# Altium PCB NRF24L01.PcbDoc
Units mil, origin at the board's own origin, x right, y up, seen from the top; angles counter-clockwise.
Board outline 6000 x 4000 mil, 2 copper layers (Top Layer, Bottom Layer); 84 components, 10 nets, 600 pads, 36 vias.
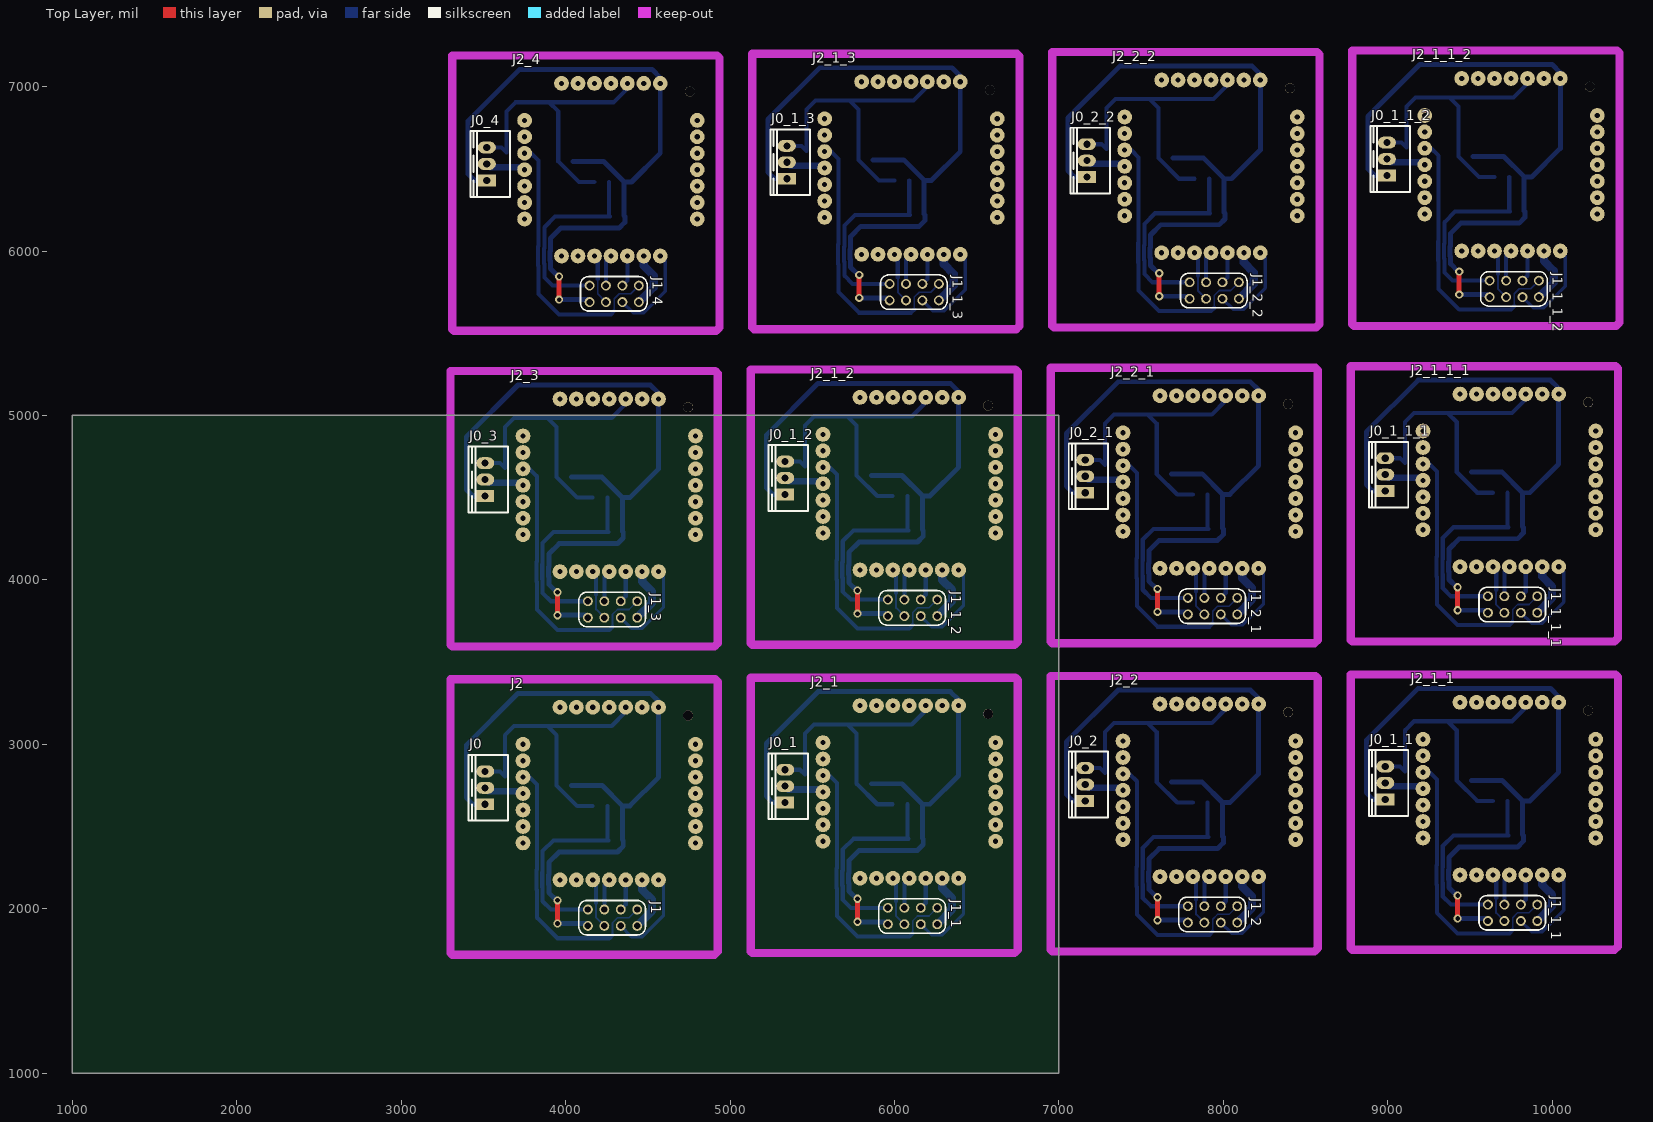
[diagram p0: Top Layer view]
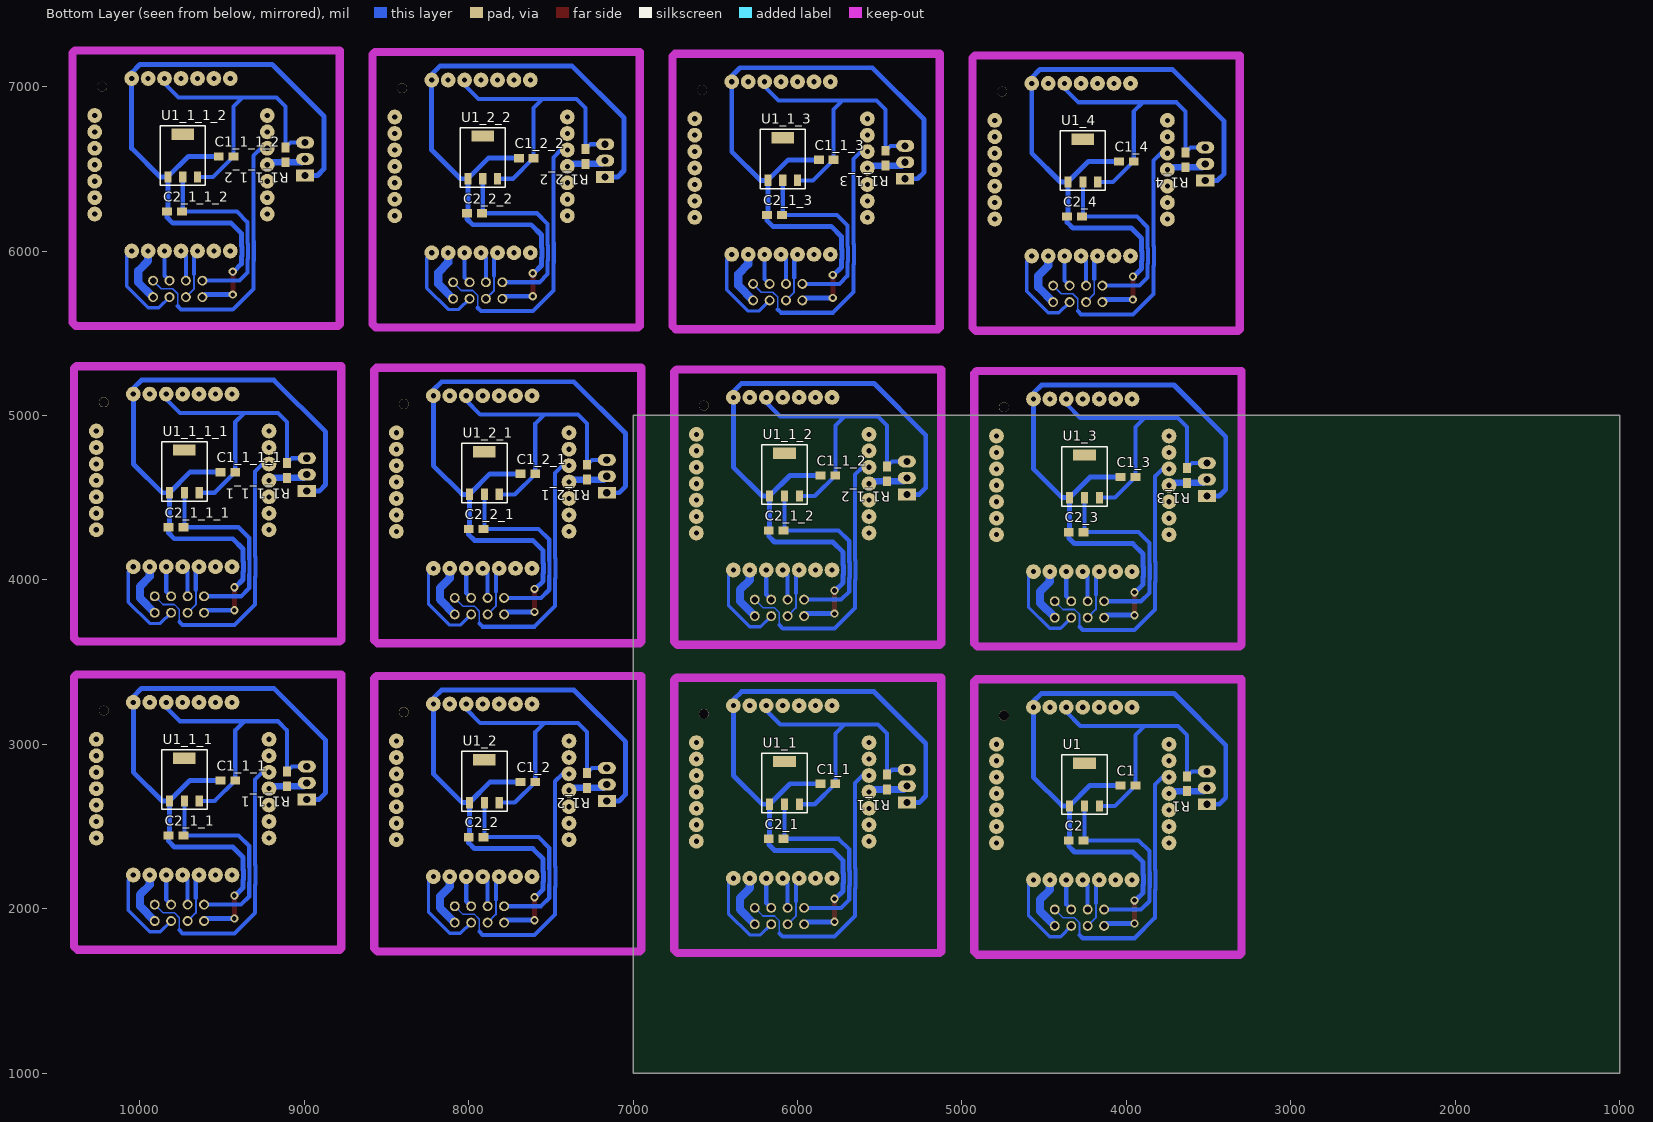
[diagram p1: Bottom Layer view, seen from below]

## Layer stack, top to bottom
Top Layer: signal copper 1.4
Dielectric: dielectric 12.6, FR-4, Dk 4.8
Bottom Layer: signal copper 1.4

## Board outline
1000,1000 7000,1000 7000,5000 1000,5000

## Design rules (kind name [scope] priority, off if disabled: settings)
Clearance [All] p1: gap=10
PolygonConnect [All] p1: connectstyle=Relief reliefconductorwidth=10 reliefentries=4 polygonreliefangle="90 Angle" airgapwidth=10
RoutingVias [All] p1: holewidth=28 width=50 viastyle="Through Hole" minholewidth=28 minwidth=50 maxholewidth=28 maxwidth=50
SolderMaskExpansion [All] p1: expansion=4
Width [All] p1: maxlimit=100 minlimit=10 preferedwidth=30
28 further rules are at their usual default settings.

## Classes and differential pairs
component class NRF24L01: C1 C2 J0 J1 J2 R1 U1

## Components (designator, comment, footprint, x,y, rotation, side; value= is the part's Value field where it differs from the comment)
C1 "10UF" 0805 3945,2750 r0 bottom
C1_1 "10UF" 0805 5770,2760 r0 bottom (schematic designator C1)
C1_1_1 "10UF" 0805 9420,2780 r0 bottom (schematic designator C1)
C1_1_1_1 "10UF" 0805 9420,4655 r0 bottom (schematic designator C1)
C1_1_1_2 "10UF" 0805 9430,6575 r0 bottom (schematic designator C1)
C1_1_2 "10UF" 0805 5770,4635 r0 bottom (schematic designator C1)
C1_1_3 "10UF" 0805 5780,6555 r0 bottom (schematic designator C1)
C1_2 "10UF" 0805 7595,2770 r0 bottom (schematic designator C1)
C1_2_1 "10UF" 0805 7595,4645 r0 bottom (schematic designator C1)
C1_2_2 "10UF" 0805 7605,6565 r0 bottom (schematic designator C1)
C1_3 "10UF" 0805 3945,4625 r0 bottom (schematic designator C1)
C1_4 "10UF" 0805 3955,6545 r0 bottom (schematic designator C1)
C2 "22UF" 0805 4260,2415 r0 bottom
C2_1 "22UF" 0805 6085,2425 r0 bottom (schematic designator C2)
C2_1_1 "22UF" 0805 9735,2445 r0 bottom (schematic designator C2)
C2_1_1_1 "22UF" 0805 9735,4320 r0 bottom (schematic designator C2)
C2_1_1_2 "22UF" 0805 9745,6240 r0 bottom (schematic designator C2)
C2_1_2 "22UF" 0805 6085,4300 r0 bottom (schematic designator C2)
C2_1_3 "22UF" 0805 6095,6220 r0 bottom (schematic designator C2)
C2_2 "22UF" 0805 7910,2435 r0 bottom (schematic designator C2)
C2_2_1 "22UF" 0805 7910,4310 r0 bottom (schematic designator C2)
C2_2_2 "22UF" 0805 7920,6230 r0 bottom (schematic designator C2)
C2_3 "22UF" 0805 4260,4290 r0 bottom (schematic designator C2)
C2_4 "22UF" 0805 4270,6210 r0 bottom (schematic designator C2)
J0 "CON3" CON3 3510,2635 r90 top
J0_1 "CON3" CON3 5335,2645 r90 top (schematic designator J0)
J0_1_1 "CON3" CON3 8985,2665 r90 top (schematic designator J0)
J0_1_1_1 "CON3" CON3 8985,4540 r90 top (schematic designator J0)
J0_1_1_2 "CON3" CON3 8995,6460 r90 top (schematic designator J0)
J0_1_2 "CON3" CON3 5335,4520 r90 top (schematic designator J0)
J0_1_3 "CON3" CON3 5345,6440 r90 top (schematic designator J0)
J0_2 "CON3" CON3 7160,2655 r90 top (schematic designator J0)
J0_2_1 "CON3" CON3 7160,4530 r90 top (schematic designator J0)
J0_2_2 "CON3" CON3 7170,6450 r90 top (schematic designator J0)
J0_3 "CON3" CON3 3510,4510 r90 top (schematic designator J0)
J0_4 "CON3" CON3 3520,6430 r90 top (schematic designator J0)
J1 "Component_1" NRF24L01 4235,1945 r270 top
J1_1 "Component_1" NRF24L01 6060,1955 r270 top (schematic designator J1)
J1_1_1 "Component_1" NRF24L01 9710,1975 r270 top (schematic designator J1)
J1_1_1_1 "Component_1" NRF24L01 9710,3850 r270 top (schematic designator J1)
J1_1_1_2 "Component_1" NRF24L01 9720,5770 r270 top (schematic designator J1)
J1_1_2 "Component_1" NRF24L01 6060,3830 r270 top (schematic designator J1)
J1_1_3 "Component_1" NRF24L01 6070,5750 r270 top (schematic designator J1)
J1_2 "Component_1" NRF24L01 7885,1965 r270 top (schematic designator J1)
J1_2_1 "Component_1" NRF24L01 7885,3840 r270 top (schematic designator J1)
J1_2_2 "Component_1" NRF24L01 7895,5760 r270 top (schematic designator J1)
J1_3 "Component_1" NRF24L01 4235,3820 r270 top (schematic designator J1)
J1_4 "Component_1" NRF24L01 4245,5740 r270 top (schematic designator J1)
J2 "MAGI-M8" MAGI-M8 4265,2700 r0 top
J2_1 "MAGI-M8" MAGI-M8 6090,2710 r0 top (schematic designator J2)
J2_1_1 "MAGI-M8" MAGI-M8 9740,2730 r0 top (schematic designator J2)
J2_1_1_1 "MAGI-M8" MAGI-M8 9740,4605 r0 top (schematic designator J2)
J2_1_1_2 "MAGI-M8" MAGI-M8 9750,6525 r0 top (schematic designator J2)
J2_1_2 "MAGI-M8" MAGI-M8 6090,4585 r0 top (schematic designator J2)
J2_1_3 "MAGI-M8" MAGI-M8 6100,6505 r0 top (schematic designator J2)
J2_2 "MAGI-M8" MAGI-M8 7915,2720 r0 top (schematic designator J2)
J2_2_1 "MAGI-M8" MAGI-M8 7915,4595 r0 top (schematic designator J2)
J2_2_2 "MAGI-M8" MAGI-M8 7925,6515 r0 top (schematic designator J2)
J2_3 "MAGI-M8" MAGI-M8 4265,4575 r0 top (schematic designator J2)
J2_4 "MAGI-M8" MAGI-M8 4275,6495 r0 top (schematic designator J2)
R1 "RES1" 0805 3630,2805 r270 bottom
R1_1 "RES1" 0805 5455,2815 r270 bottom (schematic designator R1)
R1_1_1 "RES1" 0805 9105,2835 r270 bottom (schematic designator R1)
R1_1_1_1 "RES1" 0805 9105,4710 r270 bottom (schematic designator R1)
R1_1_1_2 "RES1" 0805 9115,6630 r270 bottom (schematic designator R1)
R1_1_2 "RES1" 0805 5455,4690 r270 bottom (schematic designator R1)
R1_1_3 "RES1" 0805 5465,6610 r270 bottom (schematic designator R1)
R1_2 "RES1" 0805 7280,2825 r270 bottom (schematic designator R1)
R1_2_1 "RES1" 0805 7280,4700 r270 bottom (schematic designator R1)
R1_2_2 "RES1" 0805 7290,6620 r270 bottom (schematic designator R1)
R1_3 "RES1" 0805 3630,4680 r270 bottom (schematic designator R1)
R1_4 "RES1" 0805 3640,6600 r270 bottom (schematic designator R1)
U1 "LM1117" SOT-223 4345,2625 r180 bottom
U1_1 "LM1117" SOT-223 6170,2635 r180 bottom (schematic designator U1)
U1_1_1 "LM1117" SOT-223 9820,2655 r180 bottom (schematic designator U1)
U1_1_1_1 "LM1117" SOT-223 9820,4530 r180 bottom (schematic designator U1)
U1_1_1_2 "LM1117" SOT-223 9830,6450 r180 bottom (schematic designator U1)
U1_1_2 "LM1117" SOT-223 6170,4510 r180 bottom (schematic designator U1)
U1_1_3 "LM1117" SOT-223 6180,6430 r180 bottom (schematic designator U1)
U1_2 "LM1117" SOT-223 7995,2645 r180 bottom (schematic designator U1)
U1_2_1 "LM1117" SOT-223 7995,4520 r180 bottom (schematic designator U1)
U1_2_2 "LM1117" SOT-223 8005,6440 r180 bottom (schematic designator U1)
U1_3 "LM1117" SOT-223 4345,4500 r180 bottom (schematic designator U1)
U1_4 "LM1117" SOT-223 4355,6420 r180 bottom (schematic designator U1)

## Footprints (in the part's own frame and the unit in brackets; to place one, negate y for a bottom-side part, rotate by r counter-clockwise, add the part's x,y. Pads: shape width x height; smd on the part's side, far side on the other; paste and mask are expansions set on the pad)
0805 [mil]
  rect 60x50 smd: 1(0,0) 2(90,0)
CON3 [mil]
  rect 72x110 hole 43.31: 1(0,0)
  oval 72x110 hole 43.31: 2(100,0) 3(200,0)
  silkscreen extent -100,-140 300,100
MAGI-M8 [mil]
  round 90 hole 31.5: 1(300,525) 2(200,525) 3(100,525) 4(0,525) 5(-100,525) 6(-200,525) 7(-300,525) 8(-525,300) 9(-525,200) 10(-525,100) 11(-525,0) 12(-525,-100) 13(-525,-200) 14(-525,-300) 15(-300,-525) 16(-200,-525) 17(-100,-525) 18(0,-525) 19(100,-525) 20(200,-525) 21(300,-525) 22(525,-300) 23(525,-200) 24(525,-100) 25(525,0) 26(525,100) 27(525,200) 28(525,300)
NRF24L01 [mil]
  round 60 hole 39.37: 1(50,-100) 2(-50,-100) 3(50,0) 4(-50,0) 5(50,100) 6(-50,100) 7(50,200) 8(-50,200)
  silkscreen extent -105,-155 105,250
SOT-223 [mm]
  rect 1.1x1.75 smd: 1(0,0) 2(2.3,0) 3(4.6,0)
  rect 3.5x1.75 smd: 4(2.3,6.6)
  silkscreen extent -1.2,-1.3 5.8,7.9

## Part data
C1 C1_1 C1_1_1 C1_1_1_1 C1_1_1_2 C1_1_2 C1_1_3 C1_2 C1_2_1 C1_2_2 C1_3 C1_4 C2 C2_1 C2_1_1 C2_1_1_1 C2_1_1_2 C2_1_2 C2_1_3 C2_2 C2_2_1 C2_2_2 C2_3 C2_4: library part CAP_1, "Capacitor"
J0 J0_1 J0_1_1 J0_1_1_1 J0_1_1_2 J0_1_2 J0_1_3 J0_2 J0_2_1 J0_2_2 J0_3 J0_4: "Connector"

## Free pads (board coordinates)
  round 60 hole 60: 1(4745,3175) 1(4745,5050) 1(4755,6970) 1(6570,3185) 1(6570,5060) 1(6580,6980) 1(8395,3195) 1(8395,5070) 1(8405,6990) 1(10220,3205) 1(10220,5080) 1(10230,7000)

## Via types
v1: diameter 50, hole 28, Top Layer to Bottom Layer, 36 vias

## Nets (pads, with @x,y where several pads share a name; then routed paths per layer and width w, separated by ;. In a path a pad name is that pad's centre, name@x,y a point inside that pad or via, vN(x,y) a via of type N, cw(c..) or ccw(c..) an arc to the next point about the centre after c; other vN are vias at no path point)
GND: C1.2 C2.2 J0.1 J1.1 J2.1 U1.1 | length 4209.3
  Top Layer w30: v1(3950,1910) v1(3950,2050)
  Bottom Layer w30: J0.1 3435,2635 3395,2675 3395,2995 3710,3310 4515,3310 4565,3260 v1(4565,3225) 4565,2800 4390,2625 U1.1 ; v1(3950,1910) J1.1@4120,1910 ; v1@3950,2037.5 v1(3950,2050) 3945,2050 3897.5,2097.5 3897.5,2143.51 3895,2146.01 3895,2203.99 3897.5,2206.49 3897.5,2282.5 3960,2345 4315,2345 4350,2380 C2.2 4345,2420 U1.1 ; C1.2 4220.91,2750 4345,2625.91 U1.1
NetJ0_2: J0.2 J2.11 R1.2 | length 244.5
  Bottom Layer w30: J0.2 J0.2@3530,2715 ; J2.11@3725,2715 J2.11
  Bottom Layer w40: J0.2@3530,2715 R1.2 J2.11@3725,2715
PB1: J1.3 J2.17 | length 309
  Bottom Layer w12: 4185,2035 4185,1945 J1.3
  Bottom Layer w25: J2.17 4185,2155 4185,2035
PB2: J1.4 J2.18 | length 192.4
  Bottom Layer w25: J1.4 4235,2145 J2.18
PB3: J1.6 J2.19 | length 192.4
  Bottom Layer w25: J1.6 4365,2025 J2.19
PB4: J1.7 J2.20 | length 342.1
  Bottom Layer w50: J1.7 4525,1985 4525,2055 4465,2115 J2.20
PB5: J1.5 J2.21 | length 568.2
  Bottom Layer w20: J1.5 4400,1830 4465,1830 4595,1960 4595,2145 J2.21
PD2: J1.8 J2.10 | length 1703.9
  Bottom Layer w10: 4285,1830 4285,1840 4285,1915 4315,1945 4385,1945 J1.8
  Bottom Layer w25: J2.10 3780,2800 3825,2755 3825,2236.53 3822.5,2234.03 3822.5,2115.97 3825,2113.47 3825,1945 3950,1820 4265,1820 4285,1840
VCC: C1.1 J0.3 J2.3 R1.1 U1.3 | length 1828.9
  Bottom Layer w25: J0.3 3600,2835 R1.1 3630,3055 3685,3110 3890,3110 ; U1.3 4070,2625 C1.1 3945,3055 3890,3110 ; J2.3@4365,3195 4280,3110 3890,3110
VCC3.3: C2.1 J1.2 U1.2 | length 1242
  Bottom Layer w25: J1.2 3910,1995 3860,2045 3860,2127.97 3857.5,2130.47 3857.5,2219.53 3860,2222.03 3860,2350 3925,2415 C2.1 4254.45,2420.55 U1.2
pads on no net: C1_1.1 C1_1.2 C1_1_1.1 C1_1_1.2 C1_1_1_1.1 C1_1_1_1.2 C1_1_1_2.1 C1_1_1_2.2 C1_1_2.1 C1_1_2.2 C1_1_3.1 C1_1_3.2 C1_2.1 C1_2.2 C1_2_1.1 C1_2_1.2 C1_2_2.1 C1_2_2.2 C1_3.1 C1_3.2 C1_4.1 C1_4.2 C2_1.1 C2_1.2 C2_1_1.1 C2_1_1.2 C2_1_1_1.1 C2_1_1_1.2 C2_1_1_2.1 C2_1_1_2.2 C2_1_2.1 C2_1_2.2 C2_1_3.1 C2_1_3.2 C2_2.1 C2_2.2 C2_2_1.1 C2_2_1.2 C2_2_2.1 C2_2_2.2 C2_3.1 C2_3.2 C2_4.1 C2_4.2 J0_1.1 J0_1.2 J0_1.3 J0_1_1.1 J0_1_1.2 J0_1_1.3 J0_1_1_1.1 J0_1_1_1.2 J0_1_1_1.3 J0_1_1_2.1 J0_1_1_2.2 J0_1_1_2.3 J0_1_2.1 J0_1_2.2 J0_1_2.3 J0_1_3.1 J0_1_3.2 J0_1_3.3 J0_2.1 J0_2.2 J0_2.3 J0_2_1.1 J0_2_1.2 J0_2_1.3 J0_2_2.1 J0_2_2.2 J0_2_2.3 J0_3.1 J0_3.2 J0_3.3 J0_4.1 J0_4.2 J0_4.3 J1_1.1 J1_1.2 J1_1.3 J1_1.4 J1_1.5 J1_1.6 J1_1.7 J1_1.8 J1_1_1.1 J1_1_1.2 J1_1_1.3 J1_1_1.4 J1_1_1.5 J1_1_1.6 J1_1_1.7 J1_1_1.8 J1_1_1_1.1 J1_1_1_1.2 J1_1_1_1.3 J1_1_1_1.4 J1_1_1_1.5 J1_1_1_1.6 J1_1_1_1.7 J1_1_1_1.8 J1_1_1_2.1 J1_1_1_2.2 J1_1_1_2.3 J1_1_1_2.4 J1_1_1_2.5 J1_1_1_2.6 J1_1_1_2.7 J1_1_1_2.8 J1_1_2.1 J1_1_2.2 J1_1_2.3 J1_1_2.4 J1_1_2.5 J1_1_2.6 J1_1_2.7 J1_1_2.8 J1_1_3.1 J1_1_3.2 J1_1_3.3 J1_1_3.4 J1_1_3.5 J1_1_3.6 J1_1_3.7 J1_1_3.8 J1_2.1 J1_2.2 J1_2.3 J1_2.4 J1_2.5 J1_2.6 J1_2.7 J1_2.8 J1_2_1.1 J1_2_1.2 J1_2_1.3 J1_2_1.4 J1_2_1.5 J1_2_1.6 J1_2_1.7 J1_2_1.8 J1_2_2.1 J1_2_2.2 J1_2_2.3 J1_2_2.4 J1_2_2.5 J1_2_2.6 J1_2_2.7 J1_2_2.8 J1_3.1 J1_3.2 J1_3.3 J1_3.4 J1_3.5 J1_3.6 J1_3.7 J1_3.8 J1_4.1 J1_4.2 J1_4.3 J1_4.4 J1_4.5 J1_4.6 J1_4.7 J1_4.8 J2.2 J2.4 J2.5 J2.6 J2.7 J2.8 J2.9 J2.12 J2.13 J2.14 J2.15 J2.16 J2.22 J2.23 J2.24 J2.25 J2.26 J2.27 J2.28 J2_1.1 J2_1.2 J2_1.3 J2_1.4 J2_1.5 J2_1.6 J2_1.7 J2_1.8 J2_1.9 J2_1.10 J2_1.11 J2_1.12 J2_1.13 J2_1.14 J2_1.15 J2_1.16 J2_1.17 J2_1.18 J2_1.19 J2_1.20 J2_1.21 J2_1.22 J2_1.23 J2_1.24 J2_1.25 J2_1.26 J2_1.27 J2_1.28 J2_1_1.1 J2_1_1.2 J2_1_1.3 J2_1_1.4 J2_1_1.5 J2_1_1.6 J2_1_1.7 J2_1_1.8 J2_1_1.9 J2_1_1.10 J2_1_1.11 J2_1_1.12 J2_1_1.13 J2_1_1.14 J2_1_1.15 J2_1_1.16 J2_1_1.17 J2_1_1.18 J2_1_1.19 J2_1_1.20 J2_1_1.21 J2_1_1.22 J2_1_1.23 J2_1_1.24 J2_1_1.25 J2_1_1.26 J2_1_1.27 J2_1_1.28 J2_1_1_1.1 J2_1_1_1.2 J2_1_1_1.3 J2_1_1_1.4 J2_1_1_1.5 J2_1_1_1.6 J2_1_1_1.7 J2_1_1_1.8 J2_1_1_1.9 J2_1_1_1.10 J2_1_1_1.11 J2_1_1_1.12 J2_1_1_1.13 J2_1_1_1.14 J2_1_1_1.15 J2_1_1_1.16 J2_1_1_1.17 J2_1_1_1.18 J2_1_1_1.19 J2_1_1_1.20 J2_1_1_1.21 J2_1_1_1.22 J2_1_1_1.23 J2_1_1_1.24 J2_1_1_1.25 J2_1_1_1.26 J2_1_1_1.27 J2_1_1_1.28 J2_1_1_2.1 J2_1_1_2.2 J2_1_1_2.3 J2_1_1_2.4 J2_1_1_2.5 J2_1_1_2.6 J2_1_1_2.7 J2_1_1_2.8 J2_1_1_2.9 J2_1_1_2.10 J2_1_1_2.11 J2_1_1_2.12 J2_1_1_2.13 J2_1_1_2.14 J2_1_1_2.15 J2_1_1_2.16 J2_1_1_2.17 J2_1_1_2.18 J2_1_1_2.19 J2_1_1_2.20 J2_1_1_2.21 J2_1_1_2.22 J2_1_1_2.23 J2_1_1_2.24 J2_1_1_2.25 J2_1_1_2.26 J2_1_1_2.27 J2_1_1_2.28 J2_1_2.1 J2_1_2.2 J2_1_2.3 J2_1_2.4 J2_1_2.5 J2_1_2.6 J2_1_2.7 J2_1_2.8 J2_1_2.9 J2_1_2.10 J2_1_2.11 J2_1_2.12 J2_1_2.13 J2_1_2.14 J2_1_2.15 J2_1_2.16 J2_1_2.17 J2_1_2.18 J2_1_2.19 J2_1_2.20 J2_1_2.21 J2_1_2.22 J2_1_2.23 J2_1_2.24 J2_1_2.25 J2_1_2.26 J2_1_2.27 J2_1_2.28 J2_1_3.1 J2_1_3.2 J2_1_3.3 J2_1_3.4 J2_1_3.5 J2_1_3.6 J2_1_3.7 J2_1_3.8 J2_1_3.9 J2_1_3.10 J2_1_3.11 J2_1_3.12 J2_1_3.13 J2_1_3.14 J2_1_3.15 J2_1_3.16 J2_1_3.17 J2_1_3.18 J2_1_3.19 J2_1_3.20 J2_1_3.21 J2_1_3.22 J2_1_3.23 J2_1_3.24 J2_1_3.25 J2_1_3.26 J2_1_3.27 J2_1_3.28 J2_2.1 J2_2.2 J2_2.3 J2_2.4 J2_2.5 J2_2.6 J2_2.7 J2_2.8 J2_2.9 J2_2.10 J2_2.11 J2_2.12 J2_2.13 J2_2.14 J2_2.15 J2_2.16 J2_2.17 J2_2.18 J2_2.19 J2_2.20 J2_2.21 J2_2.22 J2_2.23 J2_2.24 J2_2.25 J2_2.26 J2_2.27 J2_2.28 J2_2_1.1 J2_2_1.2 J2_2_1.3 J2_2_1.4 J2_2_1.5 J2_2_1.6 J2_2_1.7 J2_2_1.8 J2_2_1.9 J2_2_1.10 J2_2_1.11 J2_2_1.12 J2_2_1.13 J2_2_1.14 J2_2_1.15 J2_2_1.16 J2_2_1.17 J2_2_1.18 J2_2_1.19 J2_2_1.20 J2_2_1.21 J2_2_1.22 J2_2_1.23 J2_2_1.24 J2_2_1.25 J2_2_1.26 J2_2_1.27 J2_2_1.28 J2_2_2.1 J2_2_2.2 J2_2_2.3 J2_2_2.4 J2_2_2.5 J2_2_2.6 J2_2_2.7 J2_2_2.8 J2_2_2.9 J2_2_2.10 J2_2_2.11 J2_2_2.12 J2_2_2.13 J2_2_2.14 J2_2_2.15 J2_2_2.16 J2_2_2.17 J2_2_2.18 J2_2_2.19 J2_2_2.20 J2_2_2.21 J2_2_2.22 J2_2_2.23 J2_2_2.24 J2_2_2.25 J2_2_2.26 J2_2_2.27 J2_2_2.28 J2_3.1 J2_3.2 J2_3.3 J2_3.4 J2_3.5 J2_3.6 J2_3.7 J2_3.8 J2_3.9 J2_3.10 J2_3.11 J2_3.12 J2_3.13 J2_3.14 J2_3.15 J2_3.16 J2_3.17 J2_3.18 J2_3.19 J2_3.20 J2_3.21 J2_3.22 J2_3.23 J2_3.24 J2_3.25 J2_3.26 J2_3.27 J2_3.28 J2_4.1 J2_4.2 J2_4.3 J2_4.4 J2_4.5 J2_4.6 J2_4.7 J2_4.8 J2_4.9 J2_4.10 J2_4.11 J2_4.12 J2_4.13 J2_4.14 J2_4.15 J2_4.16 J2_4.17 J2_4.18 J2_4.19 J2_4.20 J2_4.21 J2_4.22 J2_4.23 J2_4.24 J2_4.25 J2_4.26 J2_4.27 J2_4.28 R1_1.1 R1_1.2 R1_1_1.1 R1_1_1.2 R1_1_1_1.1 R1_1_1_1.2 R1_1_1_2.1 R1_1_1_2.2 R1_1_2.1 R1_1_2.2 R1_1_3.1 R1_1_3.2 R1_2.1 R1_2.2 R1_2_1.1 R1_2_1.2 R1_2_2.1 R1_2_2.2 R1_3.1 R1_3.2 R1_4.1 R1_4.2 U1.4 U1_1.1 U1_1.2 U1_1.3 U1_1.4 U1_1_1.1 U1_1_1.2 U1_1_1.3 U1_1_1.4 U1_1_1_1.1 U1_1_1_1.2 U1_1_1_1.3 U1_1_1_1.4 U1_1_1_2.1 U1_1_1_2.2 U1_1_1_2.3 U1_1_1_2.4 U1_1_2.1 U1_1_2.2 U1_1_2.3 U1_1_2.4 U1_1_3.1 U1_1_3.2 U1_1_3.3 U1_1_3.4 U1_2.1 U1_2.2 U1_2.3 U1_2.4 U1_2_1.1 U1_2_1.2 U1_2_1.3 U1_2_1.4 U1_2_2.1 U1_2_2.2 U1_2_2.3 U1_2_2.4 U1_3.1 U1_3.2 U1_3.3 U1_3.4 U1_4.1 U1_4.2 U1_4.3 U1_4.4
copper on no net: | length 119159.9
  Top Layer w30: v1(3950,3785) v1(3950,3925) ; v1(3960,5705) v1(3960,5845) ; v1(5775,1920) v1(5775,2060) ; v1(5775,3795) v1(5775,3935) ; v1(5785,5715) v1(5785,5855) ; v1(7600,1930) v1(7600,2070) ; v1(7600,3805) v1(7600,3945) ; v1(7610,5725) v1(7610,5865) ; v1(9425,1940) v1(9425,2080) ; v1(9425,3815) v1(9425,3955) ; v1(9435,5735) v1(9435,5875)
  Bottom Layer w10: 4285,3705 4285,3715 4285,3790 4315,3820 4385,3820 4435,3870 ; 4295,5625 4295,5635 4295,5710 4325,5740 4395,5740 4445,5790 ; 6110,1840 6110,1850 6110,1925 6140,1955 6210,1955 6260,2005 ; 6110,3715 6110,3725 6110,3800 6140,3830 6210,3830 6260,3880 ; 6120,5635 6120,5645 6120,5720 6150,5750 6220,5750 6270,5800 ; 7935,1850 7935,1860 7935,1935 7965,1965 8035,1965 8085,2015 ; 7935,3725 7935,3735 7935,3810 7965,3840 8035,3840 8085,3890 ; 7945,5645 7945,5655 7945,5730 7975,5760 8045,5760 8095,5810 ; 9760,1860 9760,1870 9760,1945 9790,1975 9860,1975 9910,2025 ; 9760,3735 9760,3745 9760,3820 9790,3850 9860,3850 9910,3900 ; 9770,5655 9770,5665 9770,5740 9800,5770 9870,5770 9920,5820
  Bottom Layer w12: 4185,3910 4185,3820 4235,3770 ; 4195,5830 4195,5740 4245,5690 ; 6010,2045 6010,1955 6060,1905 ; 6010,3920 6010,3830 6060,3780 ; 6020,5840 6020,5750 6070,5700 ; 7835,2055 7835,1965 7885,1915 ; 7835,3930 7835,3840 7885,3790 ; 7845,5850 7845,5760 7895,5710 ; 9660,2065 9660,1975 9710,1925 ; 9660,3940 9660,3850 9710,3800 ; 9670,5860 9670,5770 9720,5720
  Bottom Layer w20: 4335,3770 4400,3705 4465,3705 4595,3835 4595,4020 4565,4050 ; 4345,5690 4410,5625 4475,5625 4605,5755 4605,5940 4575,5970 ; 6160,1905 6225,1840 6290,1840 6420,1970 6420,2155 6390,2185 ; 6160,3780 6225,3715 6290,3715 6420,3845 6420,4030 6390,4060 ; 6170,5700 6235,5635 6300,5635 6430,5765 6430,5950 6400,5980 ; 7985,1915 8050,1850 8115,1850 8245,1980 8245,2165 8215,2195 ; 7985,3790 8050,3725 8115,3725 8245,3855 8245,4040 8215,4070 ; 7995,5710 8060,5645 8125,5645 8255,5775 8255,5960 8225,5990 ; 9810,1925 9875,1860 9940,1860 10070,1990 10070,2175 10040,2205 ; 9810,3800 9875,3735 9940,3735 10070,3865 10070,4050 10040,4080 ; 9820,5720 9885,5655 9950,5655 10080,5785 10080,5970 10050,6000
  Bottom Layer w25: 3510,4710 3600,4710 3630,4680 3630,4930 3685,4985 3890,4985 ; 3520,6630 3610,6630 3640,6600 3640,6850 3695,6905 3900,6905 ; 3740,4675 3780,4675 3825,4630 3825,4111.53 3822.5,4109.03 3822.5,3990.97 3825,3988.47 3825,3820 3950,3695 4265,3695 4285,3715 ; 3750,6595 3790,6595 3835,6550 3835,6031.53 3832.5,6029.03 3832.5,5910.97 3835,5908.47 3835,5740 3960,5615 4275,5615 4295,5635 ; 4135,3870 3910,3870 3860,3920 3860,4002.97 3857.5,4005.47 3857.5,4094.53 3860,4097.03 3860,4225 3925,4290 4260,4290 4254.45,4295.55 4254.45,4500 ; 4145,5790 3920,5790 3870,5840 3870,5922.97 3867.5,5925.47 3867.5,6014.53 3870,6017.03 3870,6145 3935,6210 4270,6210 4264.45,6215.55 4264.45,6420 ; 4163.9,4500 4070,4500 3945,4625 3945,4930 3890,4985 ; 4165,4050 4185,4030 4185,3910 ; 4173.9,6420 4080,6420 3955,6545 3955,6850 3900,6905 ; 4175,5970 4195,5950 4195,5830 ; 4235,3870 4235,4020 4265,4050 ; 4245,5790 4245,5940 4275,5970 ; 4335,3870 4365,3900 4365,4050 ; 4345,5790 4375,5820 4375,5970 ; 4365,5070 4280,4985 3890,4985 ; 4375,6990 4290,6905 3900,6905 ; 5335,2845 5425,2845 5455,2815 5455,3065 5510,3120 5715,3120 ; 5335,4720 5425,4720 5455,4690 5455,4940 5510,4995 5715,4995 ; 5345,6640 5435,6640 5465,6610 5465,6860 5520,6915 5725,6915 ; 5565,2810 5605,2810 5650,2765 5650,2246.53 5647.5,2244.03 5647.5,2125.97 5650,2123.47 5650,1955 5775,1830 6090,1830 6110,1850 ; 5565,4685 5605,4685 5650,4640 5650,4121.53 5647.5,4119.03 5647.5,4000.97 5650,3998.47 5650,3830 5775,3705 6090,3705 6110,3725 ; 5575,6605 5615,6605 5660,6560 5660,6041.53 5657.5,6039.03 5657.5,5920.97 5660,5918.47 5660,5750 5785,5625 6100,5625 6120,5645 ; 5960,2005 5735,2005 5685,2055 5685,2137.97 5682.5,2140.47 5682.5,2229.53 5685,2232.03 5685,2360 5750,2425 6085,2425 6079.45,2430.55 6079.45,2635 ; 5960,3880 5735,3880 5685,3930 5685,4012.97 5682.5,4015.47 5682.5,4104.53 5685,4107.03 5685,4235 5750,4300 6085,4300 6079.45,4305.55 6079.45,4510 ; 5970,5800 5745,5800 5695,5850 5695,5932.97 5692.5,5935.47 5692.5,6024.53 5695,6027.03 5695,6155 5760,6220 6095,6220 6089.45,6225.55 6089.45,6430 ; 5988.9,2635 5895,2635 5770,2760 5770,3065 5715,3120 ; 5988.9,4510 5895,4510 5770,4635 5770,4940 5715,4995 ; 5990,2185 6010,2165 6010,2045 ; 5990,4060 6010,4040 6010,3920 ; 5998.9,6430 5905,6430 5780,6555 5780,6860 5725,6915 ; 6000,5980 6020,5960 6020,5840 ; 6060,2005 6060,2155 6090,2185 ; 6060,3880 6060,4030 6090,4060 ; 6070,5800 6070,5950 6100,5980 ; 6160,2005 6190,2035 6190,2185 ; 6160,3880 6190,3910 6190,4060 ; 6170,5800 6200,5830 6200,5980 ; 6190,3205 6105,3120 5715,3120 ; 6190,5080 6105,4995 5715,4995 ; 6200,7000 6115,6915 5725,6915 ; 7160,2855 7250,2855 7280,2825 7280,3075 7335,3130 7540,3130 ; 7160,4730 7250,4730 7280,4700 7280,4950 7335,5005 7540,5005 ; 7170,6650 7260,6650 7290,6620 7290,6870 7345,6925 7550,6925 ; 7390,2820 7430,2820 7475,2775 7475,2256.53 7472.5,2254.03 7472.5,2135.97 7475,2133.47 7475,1965 7600,1840 7915,1840 7935,1860 ; 7390,4695 7430,4695 7475,4650 7475,4131.53 7472.5,4129.03 7472.5,4010.97 7475,4008.47 7475,3840 7600,3715 7915,3715 7935,3735 ; 7400,6615 7440,6615 7485,6570 7485,6051.53 7482.5,6049.03 7482.5,5930.97 7485,5928.47 7485,5760 7610,5635 7925,5635 7945,5655 ; 7785,2015 7560,2015 7510,2065 7510,2147.97 7507.5,2150.47 7507.5,2239.53 7510,2242.03 7510,2370 7575,2435 7910,2435 7904.45,2440.55 7904.45,2645 ; 7785,3890 7560,3890 7510,3940 7510,4022.97 7507.5,4025.47 7507.5,4114.53 7510,4117.03 7510,4245 7575,4310 7910,4310 7904.45,4315.55 7904.45,4520 ; 7795,5810 7570,5810 7520,5860 7520,5942.97 7517.5,5945.47 7517.5,6034.53 7520,6037.03 7520,6165 7585,6230 7920,6230 7914.45,6235.55 7914.45,6440 ; 7813.9,2645 7720,2645 7595,2770 7595,3075 7540,3130 ; 7813.9,4520 7720,4520 7595,4645 7595,4950 7540,5005 ; 7815,2195 7835,2175 7835,2055 ; 7815,4070 7835,4050 7835,3930 ; 7823.9,6440 7730,6440 7605,6565 7605,6870 7550,6925 ; 7825,5990 7845,5970 7845,5850 ; 7885,2015 7885,2165 7915,2195 ; 7885,3890 7885,4040 7915,4070 ; 7895,5810 7895,5960 7925,5990 ; 7985,2015 8015,2045 8015,2195 ; 7985,3890 8015,3920 8015,4070 ; 7995,5810 8025,5840 8025,5990 ; 8015,3215 7930,3130 7540,3130 ; 8015,5090 7930,5005 7540,5005 ; 8025,7010 7940,6925 7550,6925 ; 8985,2865 9075,2865 9105,2835 9105,3085 9160,3140 9365,3140 ; 8985,4740 9075,4740 9105,4710 9105,4960 9160,5015 9365,5015 ; 8995,6660 9085,6660 9115,6630 9115,6880 9170,6935 9375,6935 ; 9215,2830 9255,2830 9300,2785 9300,2266.53 9297.5,2264.03 9297.5,2145.97 9300,2143.47 9300,1975 9425,1850 9740,1850 9760,1870 ; 9215,4705 9255,4705 9300,4660 9300,4141.53 9297.5,4139.03 9297.5,4020.97 9300,4018.47 9300,3850 9425,3725 9740,3725 9760,3745 ; 9225,6625 9265,6625 9310,6580 9310,6061.53 9307.5,6059.03 9307.5,5940.97 9310,5938.47 9310,5770 9435,5645 9750,5645 9770,5665 ; 9610,2025 9385,2025 9335,2075 9335,2157.97 9332.5,2160.47 9332.5,2249.53 9335,2252.03 9335,2380 9400,2445 9735,2445 9729.45,2450.55 9729.45,2655 ; 9610,3900 9385,3900 9335,3950 9335,4032.97 9332.5,4035.47 9332.5,4124.53 9335,4127.03 9335,4255 9400,4320 9735,4320 9729.45,4325.55 9729.45,4530 ; 9620,5820 9395,5820 9345,5870 9345,5952.97 9342.5,5955.47 9342.5,6044.53 9345,6047.03 9345,6175 9410,6240 9745,6240 9739.45,6245.55 9739.45,6450 ; 9638.9,2655 9545,2655 9420,2780 9420,3085 9365,3140 ; 9638.9,4530 9545,4530 9420,4655 9420,4960 9365,5015 ; 9640,2205 9660,2185 9660,2065 ; 9640,4080 9660,4060 9660,3940 ; 9648.9,6450 9555,6450 9430,6575 9430,6880 9375,6935 ; 9650,6000 9670,5980 9670,5860 ; 9710,2025 9710,2175 9740,2205 ; 9710,3900 9710,4050 9740,4080 ; 9720,5820 9720,5970 9750,6000 ; 9810,2025 9840,2055 9840,2205 ; 9810,3900 9840,3930 9840,4080 ; 9820,5820 9850,5850 9850,6000 ; 9840,3225 9755,3140 9365,3140 ; 9840,5100 9755,5015 9365,5015 ; 9850,7020 9765,6935 9375,6935
  Bottom Layer w30: 3510,4510 3435,4510 3395,4550 3395,4870 3710,5185 4515,5185 4565,5135 v1(4565,5100) 4565,4675 4390,4500 4345,4500 ; 3510,4610 3530,4590 ; 3520,6430 3445,6430 3405,6470 3405,6790 3720,7105 4525,7105 4575,7055 v1(4575,7020) 4575,6595 4400,6420 4355,6420 ; 3520,6530 3540,6510 ; 3725,4590 3740,4575 ; 3735,6510 3750,6495 ; v1(3950,3785) 4120,3785 ; v1@3950,3912.5 v1(3950,3925) 3945,3925 3897.5,3972.5 3897.5,4018.51 3895,4021.01 3895,4078.99 3897.5,4081.49 3897.5,4157.5 3960,4220 4315,4220 4350,4255 4350,4290 4345,4295 4345,4500 ; v1(3960,5705) 4130,5705 ; v1@3960,5832.5 v1(3960,5845) 3955,5845 3907.5,5892.5 3907.5,5938.51 3905,5941.01 3905,5998.99 3907.5,6001.49 3907.5,6077.5 3970,6140 4325,6140 4360,6175 4360,6210 4355,6215 4355,6420 ; 4035,4625 4220.91,4625 4345,4500.91 4345,4500 ; 4045,6545 4230.91,6545 4355,6420.91 4355,6420 ; 5335,2645 5260,2645 5220,2685 5220,3005 5535,3320 6340,3320 6390,3270 v1(6390,3235) 6390,2810 6215,2635 6170,2635 ; 5335,2745 5355,2725 ; 5335,4520 5260,4520 5220,4560 5220,4880 5535,5195 6340,5195 6390,5145 v1(6390,5110) 6390,4685 6215,4510 6170,4510 ; 5335,4620 5355,4600 ; 5345,6440 5270,6440 5230,6480 5230,6800 5545,7115 6350,7115 6400,7065 v1(6400,7030) 6400,6605 6225,6430 6180,6430 ; 5345,6540 5365,6520 ; 5550,2725 5565,2710 ; 5550,4600 5565,4585 ; 5560,6520 5575,6505 ; v1(5775,1920) 5945,1920 ; v1@5775,2047.5 v1(5775,2060) 5770,2060 5722.5,2107.5 5722.5,2153.51 5720,2156.01 5720,2213.99 5722.5,2216.49 5722.5,2292.5 5785,2355 6140,2355 6175,2390 6175,2425 6170,2430 6170,2635 ; v1(5775,3795) 5945,3795 ; v1@5775,3922.5 v1(5775,3935) 5770,3935 5722.5,3982.5 5722.5,4028.51 5720,4031.01 5720,4088.99 5722.5,4091.49 5722.5,4167.5 5785,4230 6140,4230 6175,4265 6175,4300 6170,4305 6170,4510 ; v1(5785,5715) 5955,5715 ; v1@5785,5842.5 v1(5785,5855) 5780,5855 5732.5,5902.5 5732.5,5948.51 5730,5951.01 5730,6008.99 5732.5,6011.49 5732.5,6087.5 5795,6150 6150,6150 6185,6185 6185,6220 6180,6225 6180,6430 ; 5860,2760 6045.91,2760 6170,2635.91 6170,2635 ; 5860,4635 6045.91,4635 6170,4510.91 6170,4510 ; 5870,6555 6055.91,6555 6180,6430.91 6180,6430 ; 7160,2655 7085,2655 7045,2695 7045,3015 7360,3330 8165,3330 8215,3280 v1(8215,3245) 8215,2820 8040,2645 7995,2645 ; 7160,2755 7180,2735 ; 7160,4530 7085,4530 7045,4570 7045,4890 7360,5205 8165,5205 8215,5155 v1(8215,5120) 8215,4695 8040,4520 7995,4520 ; 7160,4630 7180,4610 ; 7170,6450 7095,6450 7055,6490 7055,6810 7370,7125 8175,7125 8225,7075 v1(8225,7040) 8225,6615 8050,6440 8005,6440 ; 7170,6550 7190,6530 ; 7375,2735 7390,2720 ; 7375,4610 7390,4595 ; 7385,6530 7400,6515 ; v1(7600,1930) 7770,1930 ; v1@7600,2057.5 v1(7600,2070) 7595,2070 7547.5,2117.5 7547.5,2163.51 7545,2166.01 7545,2223.99 7547.5,2226.49 7547.5,2302.5 7610,2365 7965,2365 8000,2400 8000,2435 7995,2440 7995,2645 ; v1(7600,3805) 7770,3805 ; v1@7600,3932.5 v1(7600,3945) 7595,3945 7547.5,3992.5 7547.5,4038.51 7545,4041.01 7545,4098.99 7547.5,4101.49 7547.5,4177.5 7610,4240 7965,4240 8000,4275 8000,4310 7995,4315 7995,4520 ; v1(7610,5725) 7780,5725 ; v1@7610,5852.5 v1(7610,5865) 7605,5865 7557.5,5912.5 7557.5,5958.51 7555,5961.01 7555,6018.99 7557.5,6021.49 7557.5,6097.5 7620,6160 7975,6160 8010,6195 8010,6230 8005,6235 8005,6440 ; 7685,2770 7870.91,2770 7995,2645.91 7995,2645 ; 7685,4645 7870.91,4645 7995,4520.91 7995,4520 ; 7695,6565 7880.91,6565 8005,6440.91 8005,6440 ; 8985,2665 8910,2665 8870,2705 8870,3025 9185,3340 9990,3340 10040,3290 v1(10040,3255) 10040,2830 9865,2655 9820,2655 ; 8985,2765 9005,2745 ; 8985,4540 8910,4540 8870,4580 8870,4900 9185,5215 9990,5215 10040,5165 v1(10040,5130) 10040,4705 9865,4530 9820,4530 ; 8985,4640 9005,4620 ; 8995,6460 8920,6460 8880,6500 8880,6820 9195,7135 10000,7135 10050,7085 v1(10050,7050) 10050,6625 9875,6450 9830,6450 ; 8995,6560 9015,6540 ; 9200,2745 9215,2730 ; 9200,4620 9215,4605 ; 9210,6540 9225,6525 ; v1(9425,1940) 9595,1940 ; v1@9425,2067.5 v1(9425,2080) 9420,2080 9372.5,2127.5 9372.5,2173.51 9370,2176.01 9370,2233.99 9372.5,2236.49 9372.5,2312.5 9435,2375 9790,2375 9825,2410 9825,2445 9820,2450 9820,2655 ; v1(9425,3815) 9595,3815 ; v1@9425,3942.5 v1(9425,3955) 9420,3955 9372.5,4002.5 9372.5,4048.51 9370,4051.01 9370,4108.99 9372.5,4111.49 9372.5,4187.5 9435,4250 9790,4250 9825,4285 9825,4320 9820,4325 9820,4530 ; v1(9435,5735) 9605,5735 ; v1@9435,5862.5 v1(9435,5875) 9430,5875 9382.5,5922.5 9382.5,5968.51 9380,5971.01 9380,6028.99 9382.5,6031.49 9382.5,6107.5 9445,6170 9800,6170 9835,6205 9835,6240 9830,6245 9830,6450 ; 9510,2780 9695.91,2780 9820,2655.91 9820,2655 ; 9510,4655 9695.91,4655 9820,4530.91 9820,4530 ; 9520,6575 9705.91,6575 9830,6450.91 9830,6450
  Bottom Layer w40: 3530,4590 3630,4590 3725,4590 ; 3540,6510 3640,6510 3735,6510 ; 5355,2725 5455,2725 5550,2725 ; 5355,4600 5455,4600 5550,4600 ; 5365,6520 5465,6520 5560,6520 ; 7180,2735 7280,2735 7375,2735 ; 7180,4610 7280,4610 7375,4610 ; 7190,6530 7290,6530 7385,6530 ; 9005,2745 9105,2745 9200,2745 ; 9005,4620 9105,4620 9200,4620 ; 9015,6540 9115,6540 9210,6540
  Bottom Layer w50: 4435,3770 4525,3860 4525,3930 4465,3990 4465,4050 ; 4445,5690 4535,5780 4535,5850 4475,5910 4475,5970 ; 6260,1905 6350,1995 6350,2065 6290,2125 6290,2185 ; 6260,3780 6350,3870 6350,3940 6290,4000 6290,4060 ; 6270,5700 6360,5790 6360,5860 6300,5920 6300,5980 ; 8085,1915 8175,2005 8175,2075 8115,2135 8115,2195 ; 8085,3790 8175,3880 8175,3950 8115,4010 8115,4070 ; 8095,5710 8185,5800 8185,5870 8125,5930 8125,5990 ; 9910,1925 10000,2015 10000,2085 9940,2145 9940,2205 ; 9910,3800 10000,3890 10000,3960 9940,4020 9940,4080 ; 9920,5720 10010,5810 10010,5880 9950,5940 9950,6000

## Keep-outs
Keep-Out Layer:
  lines w50: 3300,2135 3300,3395 4910,3395 4925,3380 4925,2125 ; 3300,2165 3300,1730 3310,1720 4905,1720 4925,1740 4925,2135 ; 3300,4010 3300,5270 4910,5270 4925,5255 4925,4000 ; 3300,4040 3300,3605 3310,3595 4905,3595 4925,3615 4925,4010 ; 3310,5930 3310,7190 4920,7190 4935,7175 4935,5920 ; 3310,5960 3310,5525 3320,5515 4915,5515 4935,5535 4935,5930 ; 3820,1720 4570,1720 ; 3820,3595 4570,3595 ; 3830,5515 4580,5515 ; 5125,2145 5125,3405 6735,3405 6750,3390 6750,2135 ; 5125,2175 5125,1740 5135,1730 6730,1730 6750,1750 6750,2145 ; 5125,4020 5125,5280 6735,5280 6750,5265 6750,4010 ; 5125,4050 5125,3615 5135,3605 6730,3605 6750,3625 6750,4020 ; 5135,5940 5135,7200 6745,7200 6760,7185 6760,5930 ; 5135,5970 5135,5535 5145,5525 6740,5525 6760,5545 6760,5940 ; 5645,1730 6395,1730 ; 5645,3605 6395,3605 ; 5655,5525 6405,5525 ; 6950,2155 6950,3415 8560,3415 8575,3400 8575,2145 ; 6950,2185 6950,1750 6960,1740 8555,1740 8575,1760 8575,2155 ; 6950,4030 6950,5290 8560,5290 8575,5275 8575,4020 ; 6950,4060 6950,3625 6960,3615 8555,3615 8575,3635 8575,4030 ; 6960,5950 6960,7210 8570,7210 8585,7195 8585,5940 ; 6960,5980 6960,5545 6970,5535 8565,5535 8585,5555 8585,5950 ; 7470,1740 8220,1740 ; 7470,3615 8220,3615 ; 7480,5535 8230,5535 ; 8775,2165 8775,3425 10385,3425 10400,3410 10400,2155 ; 8775,2195 8775,1760 8785,1750 10380,1750 10400,1770 10400,2165 ; 8775,4040 8775,5300 10385,5300 10400,5285 10400,4030 ; 8775,4070 8775,3635 8785,3625 10380,3625 10400,3645 10400,4040 ; 8785,5960 8785,7220 10395,7220 10410,7205 10410,5950 ; 8785,5990 8785,5555 8795,5545 10390,5545 10410,5565 10410,5960 ; 9295,1750 10045,1750 ; 9295,3625 10045,3625 ; 9305,5545 10055,5545
  text "MOKER" at 9180,5910 h100
  text "MOKER" at 7355,5900 h100
  text "MOKER" at 5530,5890 h100
  text "MOKER" at 3705,5880 h100
  text "TEST" at 9110,5820 h100
  text "TEST" at 7285,5810 h100
  text "TEST" at 5460,5800 h100
  text "TEST" at 3635,5790 h100
  text "NRF24L01" at 9260,5705 h100
  text "NRF24L01" at 7435,5695 h100
  text "NRF24L01" at 5610,5685 h100
  text "NRF24L01" at 3785,5675 h100
  text "DS1302" at 9205,5605 h100
  text "DS1302" at 7380,5595 h100
  text "DS1302" at 5555,5585 h100
  text "DS1302" at 3730,5575 h100
  text "MOKER" at 9170,3990 h100
  text "MOKER" at 7345,3980 h100
  text "MOKER" at 5520,3970 h100
  text "MOKER" at 3695,3960 h100
  text "TEST" at 9100,3900 h100
  text "TEST" at 7275,3890 h100
  text "TEST" at 5450,3880 h100
  text "TEST" at 3625,3870 h100
  text "NRF24L01" at 9250,3785 h100
  text "NRF24L01" at 7425,3775 h100
  text "NRF24L01" at 5600,3765 h100
  text "NRF24L01" at 3775,3755 h100
  text "DS1302" at 9195,3685 h100
  text "DS1302" at 7370,3675 h100
  text "DS1302" at 5545,3665 h100
  text "DS1302" at 3720,3655 h100
  text "MOKER" at 9170,2115 h100
  text "MOKER" at 7345,2105 h100
  text "MOKER" at 5520,2095 h100
  text "MOKER" at 3695,2085 h100
  text "TEST" at 9100,2025 h100
  text "TEST" at 7275,2015 h100
  text "TEST" at 5450,2005 h100
  text "TEST" at 3625,1995 h100
  text "NRF24L01" at 9250,1910 h100
  text "NRF24L01" at 7425,1900 h100
  text "NRF24L01" at 5600,1890 h100
  text "NRF24L01" at 3775,1880 h100
  text "DS1302" at 9195,1810 h100
  text "DS1302" at 7370,1800 h100
  text "DS1302" at 5545,1790 h100
  text "DS1302" at 3720,1780 h100